# Altium PCB Ver_1.PcbDoc
Units mm, origin at the board's own origin, x right, y up, seen from the top; angles counter-clockwise.
Board outline 44.54 x 55.86 mm, 2 copper layers (Top Layer, Bottom Layer); 26 components, 22 nets, 116 pads, 0 vias.
Unrouted connection lines stored in the file: 19.
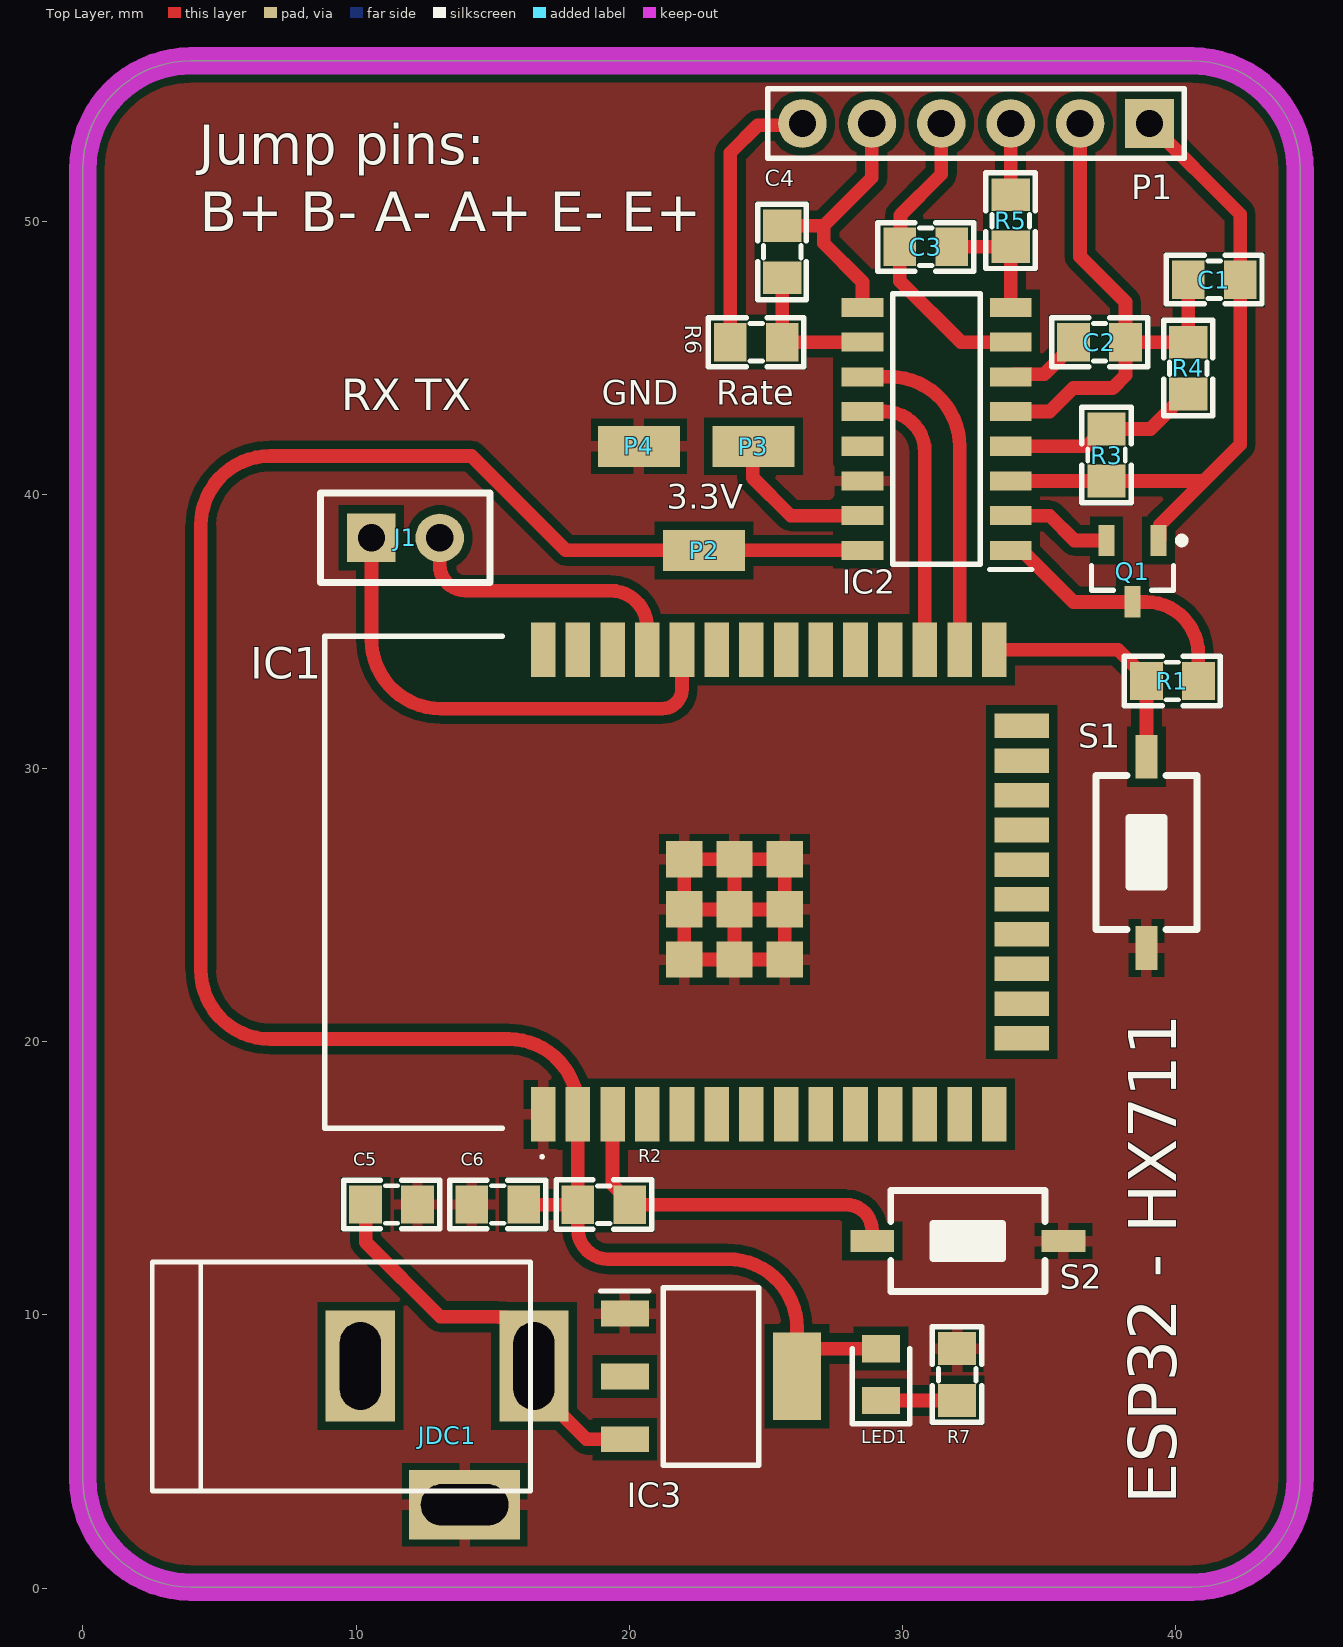
[diagram p0: Top Layer view]
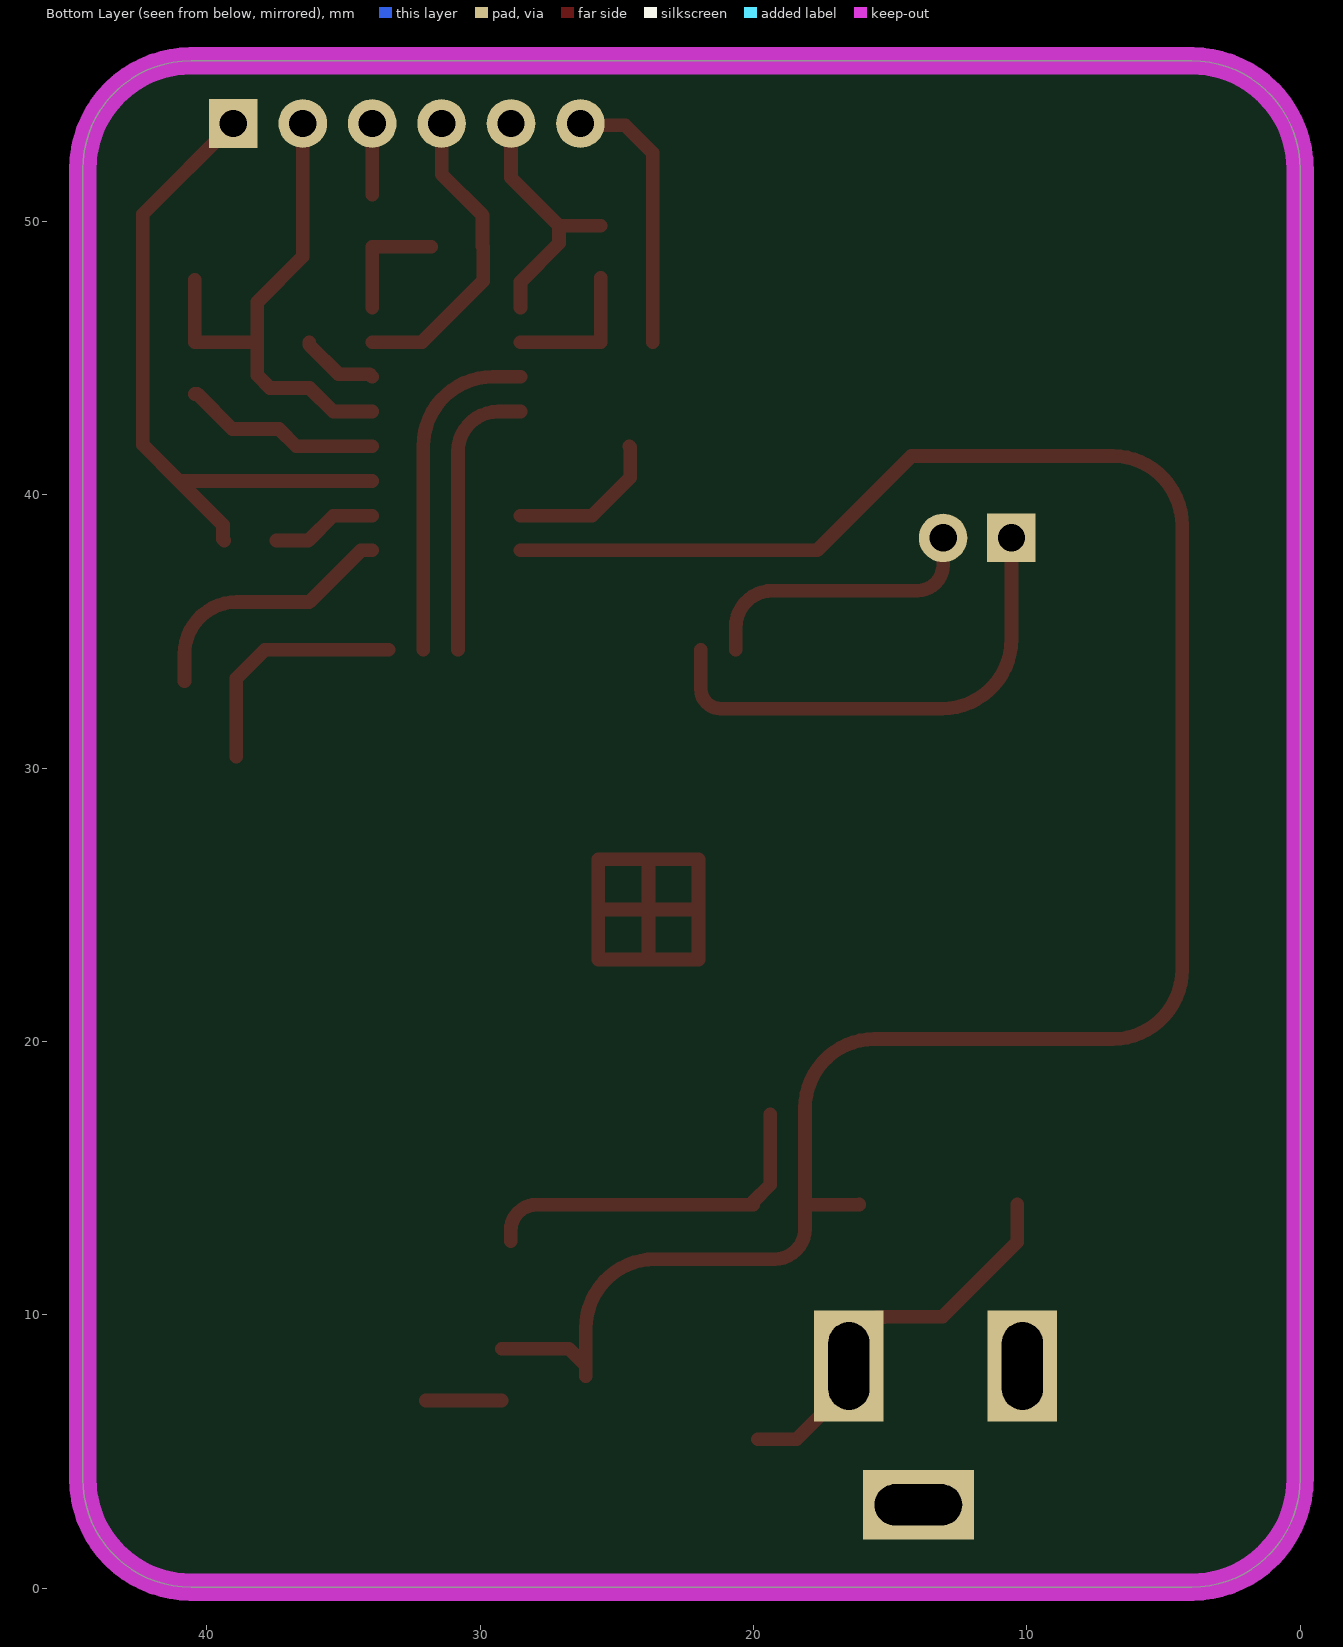
[diagram p1: Bottom Layer view, seen from below]
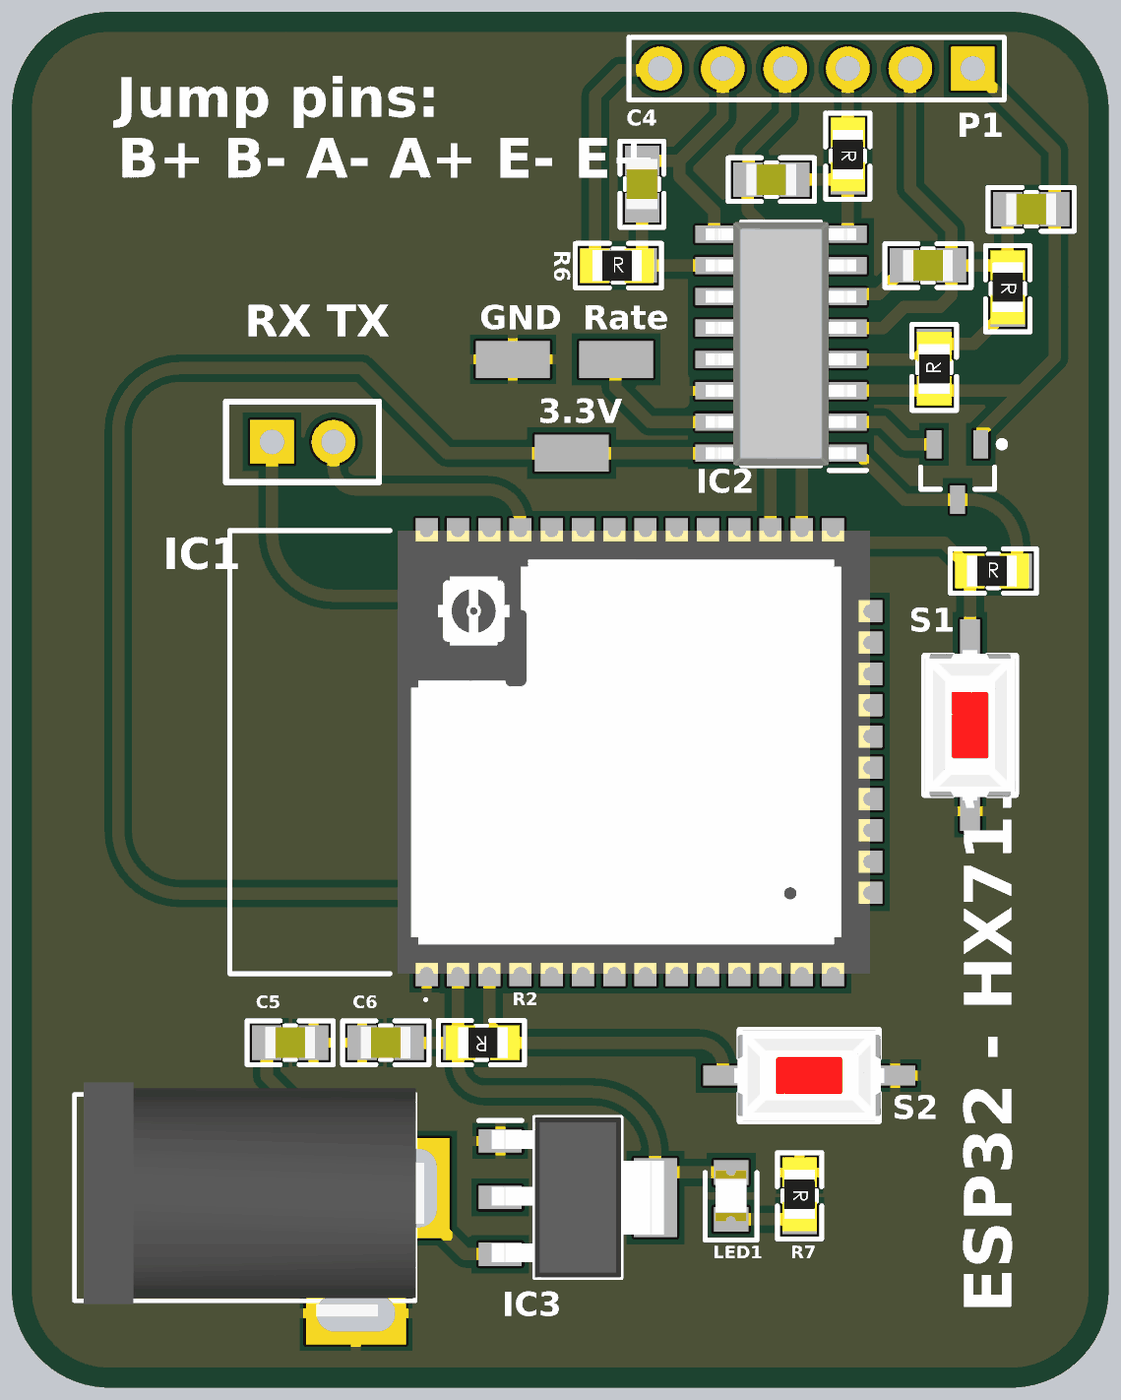
[diagram p2: 3D render of the assembled board from above, using the file's embedded part models]

## Layer stack, top to bottom
Top Solder: solder mask 0.0102, Solder Resist, Dk 3.5
Top Layer: signal copper 0.0356
Dielectric 1: dielectric 0.32, FR-4, Dk 4.8
Bottom Layer: signal copper 0.0356
Bottom Solder: solder mask 0.0102, Solder Resist, Dk 3.5

## Board outline
0,3.995 0,51.927 cw(c3.962,51.927) 3.962,55.889 40.582,55.889 cw(c40.582,51.927) 44.545,51.927 44.545,3.995 cw(c40.582,3.995) 40.582,0.032 3.962,0.032 cw(c3.962,3.995)

## Design rules (kind name [scope] priority, off if disabled: settings)
Clearance [All] p1: gap=0.3 ignorepadtopadclearanceinfootprint=FALSE
PolygonConnect [All] p1: connectstyle=Relief reliefconductorwidth=0.4 reliefentries=4 polygonreliefangle="90 Angle" airgapwidth=0.254
RoutingVias [All] p1: holewidth=0.711 width=1.27 viastyle="Through Hole" minholewidth=0.711 minwidth=1.27 maxholewidth=0.711 maxwidth=1.27
SolderMaskExpansion [All] p1: expansion=0.102 istentingtop=FALSE
Width [All] p1: maxlimit=0.8 minlimit=0.254 preferedwidth=0.5 minimp=50.000000 maximp=50.000000 favimp=50.000000
30 further rules are at their usual default settings.

## Components (designator, comment, footprint, x,y, rotation, side; value= is the part's Value field where it differs from the comment)
C1 "105" "Tu 0805" 41.398,47.879 r0 top
C2 "105" "Tu 0805" 37.211,45.59 r180 top
C3 "104" "Tu 0805" 30.849,49.08 r180 top
C4 "104" "Tu 0805" 25.589,48.895 r90 top
C5 "106" "Tu 0805" 11.303,14.034 r180 top
C6 "106" "Tu 0805" 15.188,14.034 r180 top
IC1 "ESP32-WROOM-32UE_M113EH2800UH3Q0_" ESP32WROOM32UEM113EH2800UH3Q0 21.606,25.835 r90 top
IC2 "HX711" SOIC127P600X160-16N 31.242,42.418 r180 top
IC3 "LM1117MPX-1.8" SOT230P700X180-4N 22.987,7.747 r0 top
J1 "jump don duc 2.54_2p" "jump don duc_2p" 11.938,38.354 r0 top
JDC1 "Jack DC5.5x2.1" DC-IN 13.335,5.588 r0 top
LED1 "SML-LXT0805GW-TR" LEDC2012X80N 29.21,7.813 r90 top
P1 "Header 6" HDR1X6 39.034,53.594 r180 top
P2 "Pad" Pad 24.333,37.109 r90 top
P3 "Pad" Pad 26.143,40.919 r90 top
P4 "Pad" Pad 21.952,40.919 r90 top
Q1 "PNP" SOT-23B_N 38.412,37.211 r270 top
R1 "10k" "tro smd 0805" 39.868,33.253 r0 top
R2 "10k" "tro smd 0805" 19.07,13.97 r180 top
R3 "20k" "tro smd 0805" 37.401,41.459 r90 top
R4 "8.2k" "tro smd 0805" 40.513,44.647 r270 top
R5 "1k" "tro smd 0805" 34.015,50.038 r270 top
R6 "1k" "tro smd 0805" 24.638,45.654 r0 top
R7 "300R" "Tro SMD 0805" 32.055,7.817 r270 top
S1 "MH001036" SW-SMD 38.923,26.924 r90 top value="Nút Nhấn 2 Chân 3x6x2.5MM SMD"
S2 "MH001036" SW-SMD 32.385,12.7 r180 top value="Nút Nhấn 2 Chân 3x6x2.5MM SMD"

## Footprints (in the part's own frame and the unit in brackets; to place one, negate y for a bottom-side part, rotate by r counter-clockwise, add the part's x,y. Pads: shape width x height; smd on the part's side, far side on the other; paste and mask are expansions set on the pad)
DC-IN [mm] "Jac DC input"
  rect 2.54x4.064 hole 1.5 slot 3.2 at 90 deg: 1(3.175,2.54) 2(-3.175,2.54)
  rect 4.064x2.54 hole 1.5 slot 3.2 at 0 deg: 3(0.635,-2.54)
  silkscreen extent -10.79,-2.03 3.05,6.35, body extent -10.42,-2.67 3.4,6.84, height 11.02
ESP32WROOM32UEM113EH2800UH3Q0 [mm]
  rect 2x0.9 smd: 1(-8.5,4.76) 2(-8.5,3.49) 3(-8.5,2.22) 4(-8.5,0.95) 5(-8.5,-0.32) 6(-8.5,-1.59) 7(-8.5,-2.86) 8(-8.5,-4.13) 9(-8.5,-5.4) 10(-8.5,-6.67) 11(-8.5,-7.94) 12(-8.5,-9.21) 13(-8.5,-10.48) 14(-8.5,-11.75) 25(8.5,-11.75) 26(8.5,-10.48) 27(8.5,-9.21) 28(8.5,-7.94) 29(8.5,-6.67) 30(8.5,-5.4) 31(8.5,-4.13) 32(8.5,-2.86) 33(8.5,-1.59) 34(8.5,-0.32) 35(8.5,0.95) 36(8.5,2.22) 37(8.5,3.49) 38(8.5,4.76)
  rect 0.9x2 smd: 15(-5.715,-12.75) 16(-4.445,-12.75) 17(-3.175,-12.75) 18(-1.905,-12.75) 19(-0.635,-12.75) 20(0.635,-12.75) 21(1.905,-12.75) 22(3.175,-12.75) 23(4.445,-12.75) 24(5.715,-12.75)
  rect 1.33x1.33 smd: 39(-1,-2.24) 40(-2.835,-4.075) 41(-1,-4.075) 42(0.835,-4.075) 43(0.835,-2.24) 44(0.835,-0.405) 45(-1,-0.405) 46(-2.835,-0.405) 47(-2.835,-2.24)
  silkscreen extent -10.1,4.75 9,12.75, body extent -9,-13.25 9,5.95, height 3.2
HDR1X6 [mil] "Connector; Header; 6 Position"
  rect 70x70 hole 39.37: 1(0,0)
  round 70 hole 39.37: 2(100,0) 3(200,0) 4(300,0) 5(400,0) 6(500,0)
  silkscreen extent -50,-50 550,50
"jump don duc_2p" [mil]
  rect 70x70 hole 39.37 unplated: 1(-54.15,3)
  round 70 hole 39.37 unplated: 2(44.28,3)
  silkscreen extent -128,-61 117,67
LEDC2012X80N [mm]
  rect 1x1.4 smd: 1(-0.95,0) 2(0.95,0)
  silkscreen extent -1.8,-1.05 0.95,1.05, body extent -1.02,-0.63 1.02,0.63, height 0.79
Pad [mm]
  rect 1.5x3 smd: 0(0.864,1.6)
SOIC127P600X160-16N [mm]
  rect 1.525x0.7 smd: 1(-2.712,4.445) 2(-2.712,3.175) 3(-2.712,1.905) 4(-2.712,0.635) 5(-2.712,-0.635) 6(-2.712,-1.905) 7(-2.712,-3.175) 8(-2.712,-4.445) 9(2.712,-4.445) 10(2.712,-3.175) 11(2.712,-1.905) 12(2.712,-0.635) 13(2.712,0.635) 14(2.712,1.905) 15(2.712,3.175) 16(2.712,4.445)
  silkscreen extent -3.47,-4.95 1.6,5.15, body extent -3.06,-4.94 3.06,4.94, height 2.05
SOT230P700X180-4N [mm]
  rect 1.75x0.95 smd: 1(-3.15,2.3) 2(-3.15,0) 3(-3.15,-2.3)
  rect 1.75x3.2 smd: 4(3.15,0)
  silkscreen extent -4.03,-3.25 1.75,3.25, body extent -3.5,-3.25 3.5,3.25, height 1.68
SOT-23B_N [mm] "SOT23, 3-Leads, Body 2.9x1.3mm, Pitch 0.95mm, Lead Span 2.4mm, IPC Medium Density"
  rect 1.15x0.6 smd: 1(-1.125,0.95) 2(-1.125,-0.95) 3(1.125,0)
  silkscreen extent -1.25,-1.5 0.7,1.93, body extent -0.7,-1.5 0.7,1.5, height 1.14
SW-SMD [mm] "Switch SMD type"
  rect 1.6x0.8 smd: 1(-3.5,0) 2(3.5,0)
  silkscreen extent -2.82,-1.85 2.82,1.85, body extent -3.05,-1.85 3.05,1.85, height 2.5
"tro smd 0805" [mm]
  rect 1.2x1.4 smd: 1(-0.946,-0.061) 2(0.954,-0.061)
  silkscreen extent -1.75,-0.97 1.75,0.84, body extent -1.56,-0.76 1.44,0.64, height 0.53
"Tro SMD 0805" [mm]
  rect 1.2x1.4 smd: 1(-0.946,-0.061) 2(0.954,-0.061)
  silkscreen extent -1.75,-0.97 1.75,0.84, body extent -1.56,-0.76 1.44,0.64, height 0.53
"Tu 0805" [mm] "Compoment SMD 80x50mil"
  rect 1.2x1.4 smd: 1(-0.946,-0.003) 2(0.954,-0.003)
  silkscreen extent -1.75,-0.89 1.75,0.89, body extent -1.01,-0.64 1.01,0.63, height 0.61

## Part data
C1 C2: library part "Tu 105", "Dán", Chung_Loai=Dán, Don_Vi=Con, Ma_Hang=MH004552, Ten_Linh_Kien="Tụ 0805 105-1uF 10% 50V"
C3 C4: library part "Tu 104", "Dán", Chung_Loai=Dán, Don_Vi=Con, Ma_Hang=MH004551, Ten_Linh_Kien="Tụ 0805 104-100nF 10% 50V"
C5: library part "Tu 106", "Dán", Chung_Loai=Dán, Don_Vi=Con, Ma_Hang=MH004553, Ten_Linh_Kien="Tụ 0805 106-10uF 10% 16V"
C6: library part "Tu 0805 106 16V 10%", "Dán", Chung_Loai=Dán, Don_Vi=Con, Ma_Hang=MH004553, So_Chan=2, Ten_Linh_Kien="Tụ 0805 106-10uF 10% 16V"
IC1: "Integrated Circuit", Manufacturer_Name="Espressif Systems", Manufacturer_Part_Number=ESP32-WROOM-32UE(M113EH2800UH3Q0), Mouser Part Number=N/A, Datasheet Link=https://www.mouser.co.uk/datasheet/2/891/esp32_wroom_32e_esp32_wroom_32ue_datasheet_en-1855879.pdf, Height=3.35mm, Mouser Price/Stock=https://www.mouser.co.uk/ProductDetail/Espressif-Systems/ESP32-WROOM-32UEM113EH2800UH3Q0?qs=vHuUswq2%252BswmjMZOJoYkgw%3D%3D
IC2: "Integrated Circuit", Manufacturer_Name=AVIA, Datasheet Link=https://cdn.sparkfun.com/datasheets/Sensors/ForceFlex/hx711_english.pdf, Height=1.6mm, Manufacturer_Part_Number=HX711
IC3: "Integrated Circuit", Manufacturer_Name="Texas Instruments", Mouser Part Number=926-LM1117MPX-18, Datasheet Link=http://www.ti.com/lit/gpn/lm1117, Height=1.8mm, Manufacturer_Part_Number=LM1117MPX-1.8, Mouser Price/Stock=https://www.mouser.co.uk/ProductDetail/Texas-Instruments/LM1117MPX-1.8?qs=X1J7HmVL2ZFjiBPeOqlIyg%3D%3D
JDC1: library part Jac_DC, "Cắm", Chung_Loai=Cắm, Don_Vi=Con, Ma_Hang=MH000923, Ten_Linh_Kien="Jack DC5.5x2.1MM DC5501"
LED1: "LED", Manufacturer_Name=Lumex, Mouser Part Number=696-SML-LXT0805GW, Arrow Part Number=SML-LXT0805GW-TR, Arrow Price/Stock=https://www.arrow.com/en/products/sml-lxt0805gw-tr/lumex?region=nac, Datasheet Link=http://uk.rs-online.com/web/p/products/8886304, Height=0.8mm, Manufacturer_Part_Number=SML-LXT0805GW-TR, Mouser Price/Stock=https://www.mouser.co.uk/ProductDetail/Lumex/SML-LXT0805GW-TR?qs=9HInCHf8eFiVOx4SP694cA%3D%3D
P1: "Header, 6-Pin", LatestRevisionDate=17-Jul-2002, LatestRevisionNote="Re-released for DXP Platform.", Publisher="Altium Limited"
Q1: "PNP Bipolar Transistor", LatestRevisionDate=29-May-2009, LatestRevisionNote="IPC-7351 Footprint Added.", PackageDescription="3-Pin SOT-23 Package 0.95 mm Pitch, 2.4 mm Lead Span", PackageReference=SOT-23B, PackageVersion=Aug-1999, Published=8-Jun-2000, Publisher="Altium Limited"
R1 R2: library part "Tro 0805 1% 10k", "Dán", Chung_Loai=Dán, Don_Vi=Con, Ma_Hang=MH005473, So_Chan=2, Ten_Linh_Kien="Trở 0805 1% 10k"
R3: library part "Tro 0805 5% 20k", "Dán", Chung_Loai=Dán, Don_Vi=Con, Ma_Hang=MH005247, So_Chan=2, Ten_Linh_Kien="Trở 0805 5% 20k"
R4: library part "Tro 0805 5% 8.2k", "Dán", Chung_Loai=Dán, Don_Vi=Con, Ma_Hang=MH005312, So_Chan=2, Ten_Linh_Kien="Trở 0805 5% 8.2k"
R5 R6: library part "Tro 0805 5% 1k", "Dán", Chung_Loai=Dán, Don_Vi=Con, Ma_Hang=MH005234, So_Chan=2, Ten_Linh_Kien="Trở 0805 5% 1k"
R7: library part "Tro 0805 5% 300R", "Dán", Chung_Loai=Dán, Don_Vi=Con, Ma_Hang=MH005335, So_Chan=2, Ten_Linh_Kien="Trở 0805 5% 300R"
S1 S2: library part SW-SMD, "Dán"

## Nets (pads, with @x,y where several pads share a name; then routed paths per layer and width w, separated by ;. In a path a pad name is that pad's centre, name@x,y a point inside that pad or via, vN(x,y) a via of type N, cw(c..) or ccw(c..) an arc to the next point about the centre after c; other vN are vias at no path point)
3.3V: C6.1 IC1.2 IC2.1 IC2.16 IC3.4 LED1.2 P2.0 Q1.3 R1.2 R2.2 | length 91.3
  Top Layer w0.5: C6.1 16.137,14.034 R2.2@18.113,14.034 ; IC3.4 IC3.4@26.137,8.138 ; IC2.16 P2.0 17.678,37.973 14.224,41.427 6.858,41.427 ccw(c6.858,38.887) 4.318,38.887 4.318,22.631 ccw(c6.858,22.631) 6.858,20.091 15.576,20.091 cw(c15.576,17.551) 18.116,17.551 IC1.2 R2.2 18.116,13.151 ccw(c19.228,13.151) 19.228,12.04 23.597,12.04 cw(c23.597,9.5) 26.137,9.5 IC3.4@26.137,8.138 ; LED1.2 26.762,8.763 IC3.4@26.137,8.138 ; IC2.1 34.366,37.973 36.254,36.086 Q1.3 38.905,36.086 cw(c38.905,34.168) 40.823,34.168 R1.2
A+: P1.3 R5.1 | length 2.6
  Top Layer w0.5: R5.1 P1.3
A-: C3.2 IC2.7 P1.4 | length 11.4
  Top Layer w0.5: P1.4 31.414,51.734 29.921,50.241 29.921,49.109 C3.2 29.895,47.829 32.131,45.593 IC2.7
B+: P1.6 R6.1 | length 10
  Top Layer w0.5: R6.1 23.692,52.521 24.695,53.524 26.264,53.524 P1.6
B-: C4.2 IC2.9 P1.5 | length 9.6
  Top Layer w0.5: C4.2 27.116,49.849 ; IC2.9 28.53,47.797 27.116,49.211 27.116,49.849 ; P1.5 28.874,51.607 27.116,49.849
DOUT: IC1.27 IC2.12 | length 10.4
  Top Layer w0.5: IC2.12 29.344,43.053 cw(c29.344,41.581) 30.816,41.581 IC1.27
E+: C1.2 IC2.3 P1.1 Q1.1 R3.1 | length 24.9
  Top Layer w0.5: IC2.3 R3.1 41.021,40.513 ; P1.1 42.352,50.276 C1.2 42.352,41.844 41.021,40.513 ; Q1.1 39.412,38.386 39.412,38.904 41.021,40.513
E-: C1.1 C2.1 IC2.5 P1.2 R4.1 | length 19.2
  Top Layer w0.5: IC2.5 35.382,43.053 36.246,43.917 37.694,43.917 38.157,44.38 C2.1 ; P1.2 36.494,48.723 38.157,47.06 C2.1 ; C1.1 R4.1 C2.1
GND: C5.1 C6.2 IC1.1 IC1.39 IC1.40 IC1.41 IC1.42 IC1.43 IC1.44 IC1.45 IC1.46 IC1.47 IC2.14 IC3.1 JDC1.3 P4.0 R7.1 S1.1 S2.1 | length 22
  Top Layer w0.5: IC1.45 IC1.44 IC1.43 ; IC1.45 IC1.46 IC1.47 ; IC1.45 IC1.39 ; IC1.47 IC1.39 ; IC1.47 IC1.40 IC1.41 ; IC1.39 IC1.43 ; IC1.39 IC1.41 ; IC1.43 IC1.42 IC1.41
NetC3_1: C3.1 IC2.8 R5.2 | length 4.4
  Top Layer w0.5: C3.1 R5.2 IC2.8
NetC4_1: C4.1 IC2.10 R6.2 | length 5.3
  Top Layer w0.5: C4.1 R6.2 IC2.10
NetIC1_3: IC1.3 R2.1 S2.2 | length 13.4
  Top Layer w0.5: IC1.3 19.386,14.761 20.016,14.131 R2.1 27.938,14.031 cw(c27.938,13.083) 28.885,13.083 S2.2
NetIC1_25: IC1.25 R1.1 S1.2 | length 8.9
  Top Layer w0.5: IC1.25 37.88,34.335 38.923,33.292 R1.1 S1.2
NetIC2_2: IC2.2 Q1.2 | length 3.9
  Top Layer w0.5: IC2.2 35.382,39.243 36.289,38.336 Q1.2
NetIC2_4: IC2.4 R3.2 R4.2 | length 7.3
  Top Layer w0.5: IC2.4 36.732,41.783 37.362,42.413 R3.2 39.072,42.413 40.352,43.693 R4.2
NetLED1_1: LED1.1 R7.2 | length 2.8
  Top Layer w0.5: LED1.1 R7.2
Rate: IC2.15 P3.0 | length 5.8
  Top Layer w0.5: P3.0 24.511,41.751 24.511,40.64 25.908,39.243 IC2.15
RX: IC1.34 J1.1 | length 18.4
  Top Layer w0.5: J1.1 10.563,34.722 ccw(c13.103,34.722) 13.103,32.182 21.209,32.182 ccw(c21.209,32.899) 21.926,32.899 IC1.34
SCK: IC1.26 IC2.11 | length 12.5
  Top Layer w0.5: IC2.11 29.546,44.323 cw(c29.546,41.783) 32.086,41.783 IC1.26
TX: IC1.35 J1.2 | length 10.7
  Top Layer w0.5: J1.2 13.063,37.433 ccw(c13.995,37.433) 13.995,36.5 19.304,36.5 cw(c19.304,35.148) 20.656,35.148 IC1.35
VBG: C2.2 IC2.6 | length 2.9
  Top Layer w0.5: IC2.6 34.054,44.423 35.187,44.423 36.257,45.493 C2.2
Vin: C5.2 IC3.3 JDC1.1 | length 14.7
  Top Layer w0.5: C5.2 10.349,12.664 13.081,9.931 15.197,9.931 15.219,9.91 15.49,9.91 16.51,8.89 JDC1.1 16.51,7.366 18.429,5.447 IC3.3
pads on no net: IC1.4 IC1.5 IC1.6 IC1.7 IC1.8 IC1.9 IC1.10 IC1.11 IC1.12 IC1.13 IC1.14 IC1.15 IC1.16 IC1.17 IC1.18 IC1.19 IC1.20 IC1.21 IC1.22 IC1.23 IC1.24 IC1.28 IC1.29 IC1.30 IC1.31 IC1.32 IC1.33 IC1.36 IC1.37 IC1.38 IC2.13 IC3.2 JDC1.2

## Polygon pours and split planes (outlines as drawn)
GND on Top Layer "GND_L01_P000" (solid, remove dead copper, pour order 0): 41.986,55.88 cw(c41.986,53.34) 44.526,53.34 44.526,2.591 cw(c41.986,2.591) 41.986,0.051 2.54,0.051 cw(c2.54,2.591) 0,2.591 0,53.34 cw(c2.54,53.34) 2.54,55.88 23.114,55.88

## Keep-outs
Keep-Out Layer:
  the board outline again, w1

## Silkscreen, mask and mechanical layers (free items; w line width, h text height)
Top Overlay:
  text "Jump pins:" at 4.242,51.632 h2.5
  text "B+ B- A- A+ E- E+" at 4.288,49.17 h2.5
  text "GND" at 18.996,43.012 h1.52
  text "Rate" at 23.187,43.012 h1.52
  text "RX TX" at 9.452,42.718 h2
  text "3.3V" at 21.377,39.211 h1.52
  text "ESP32 - HX711" at 40.596,3.067 h3 r90